# Altium PCB xbee reciever and main.PcbDoc
Units mil, origin at the board's own origin, x right, y up, seen from the top; angles counter-clockwise.
Board outline 2348.03 x 1777.03 mil, 2 copper layers (Top Layer, Bottom Layer); 54 components, 38 nets, 205 pads, 126 vias.
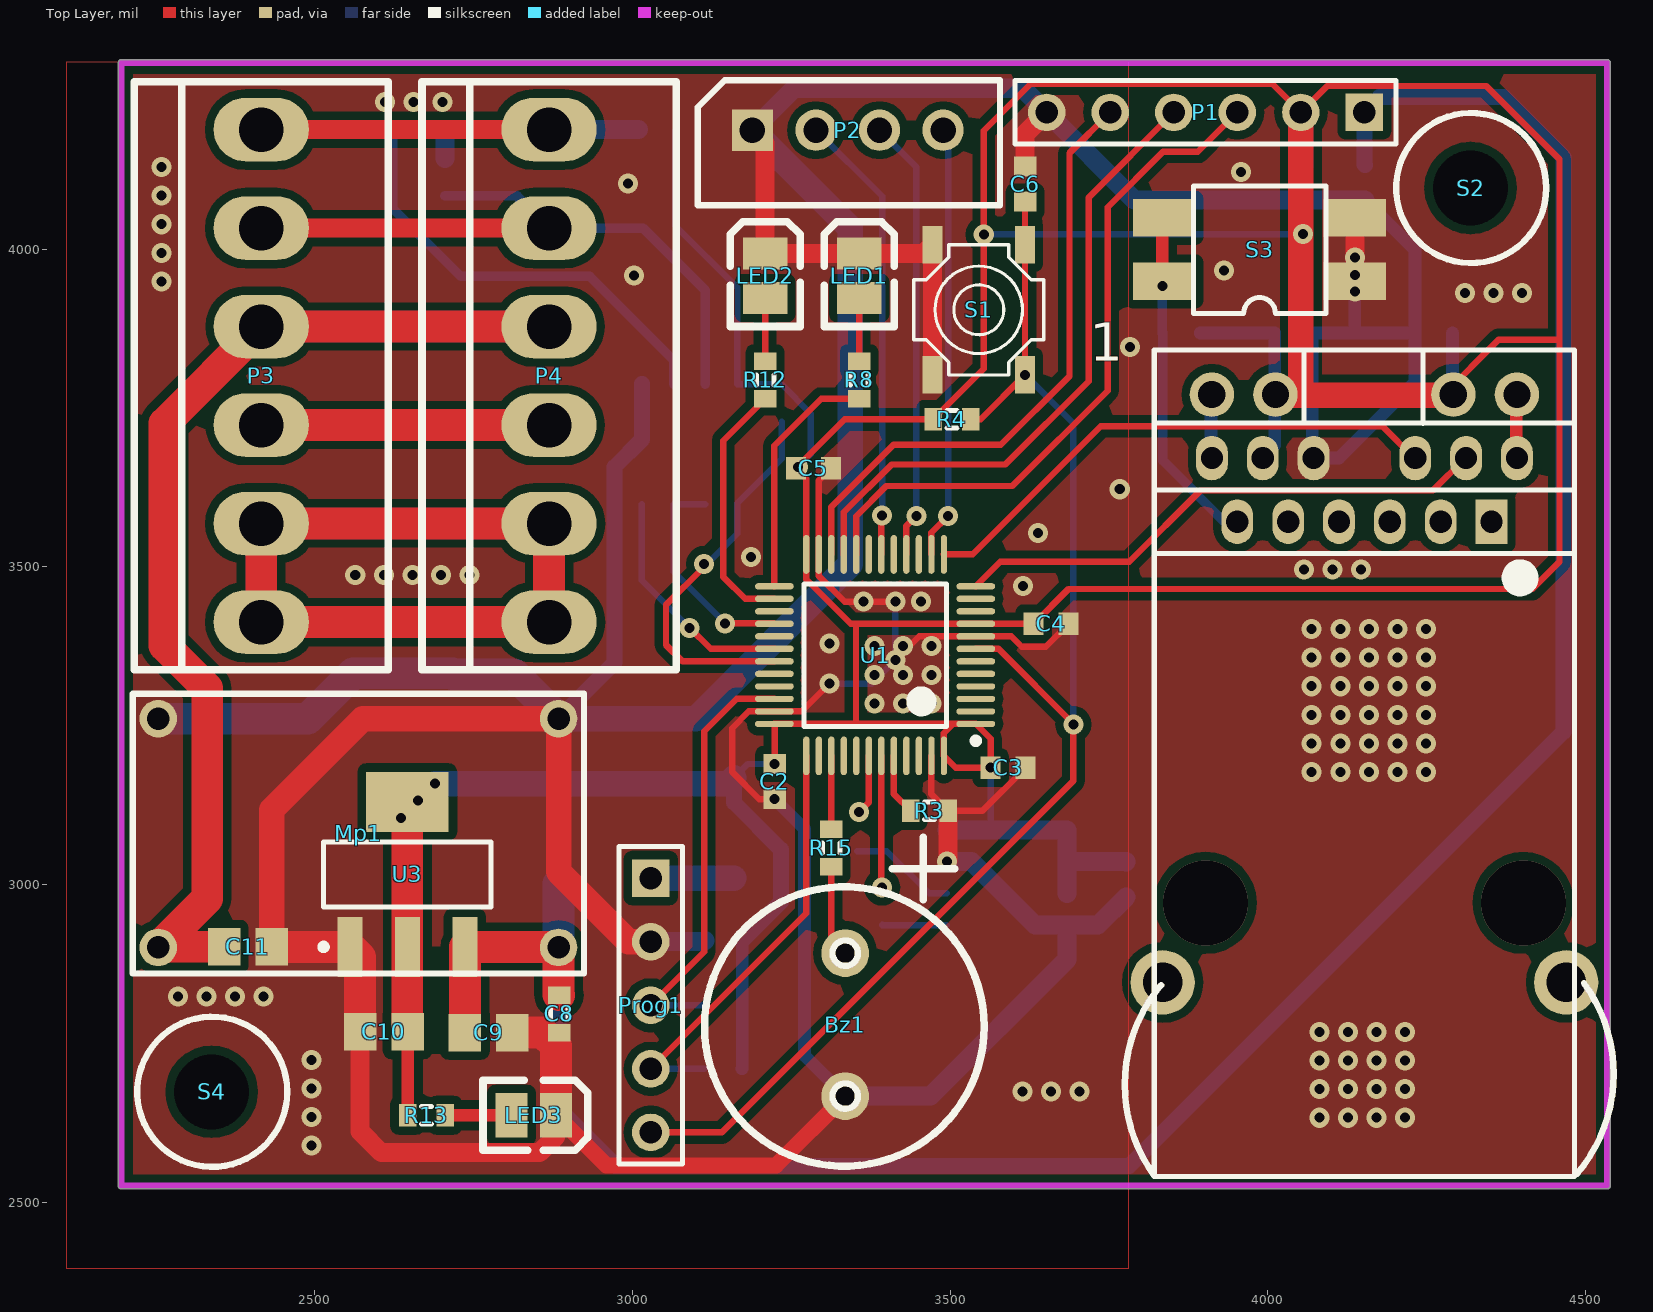
[diagram p0: Top Layer view]
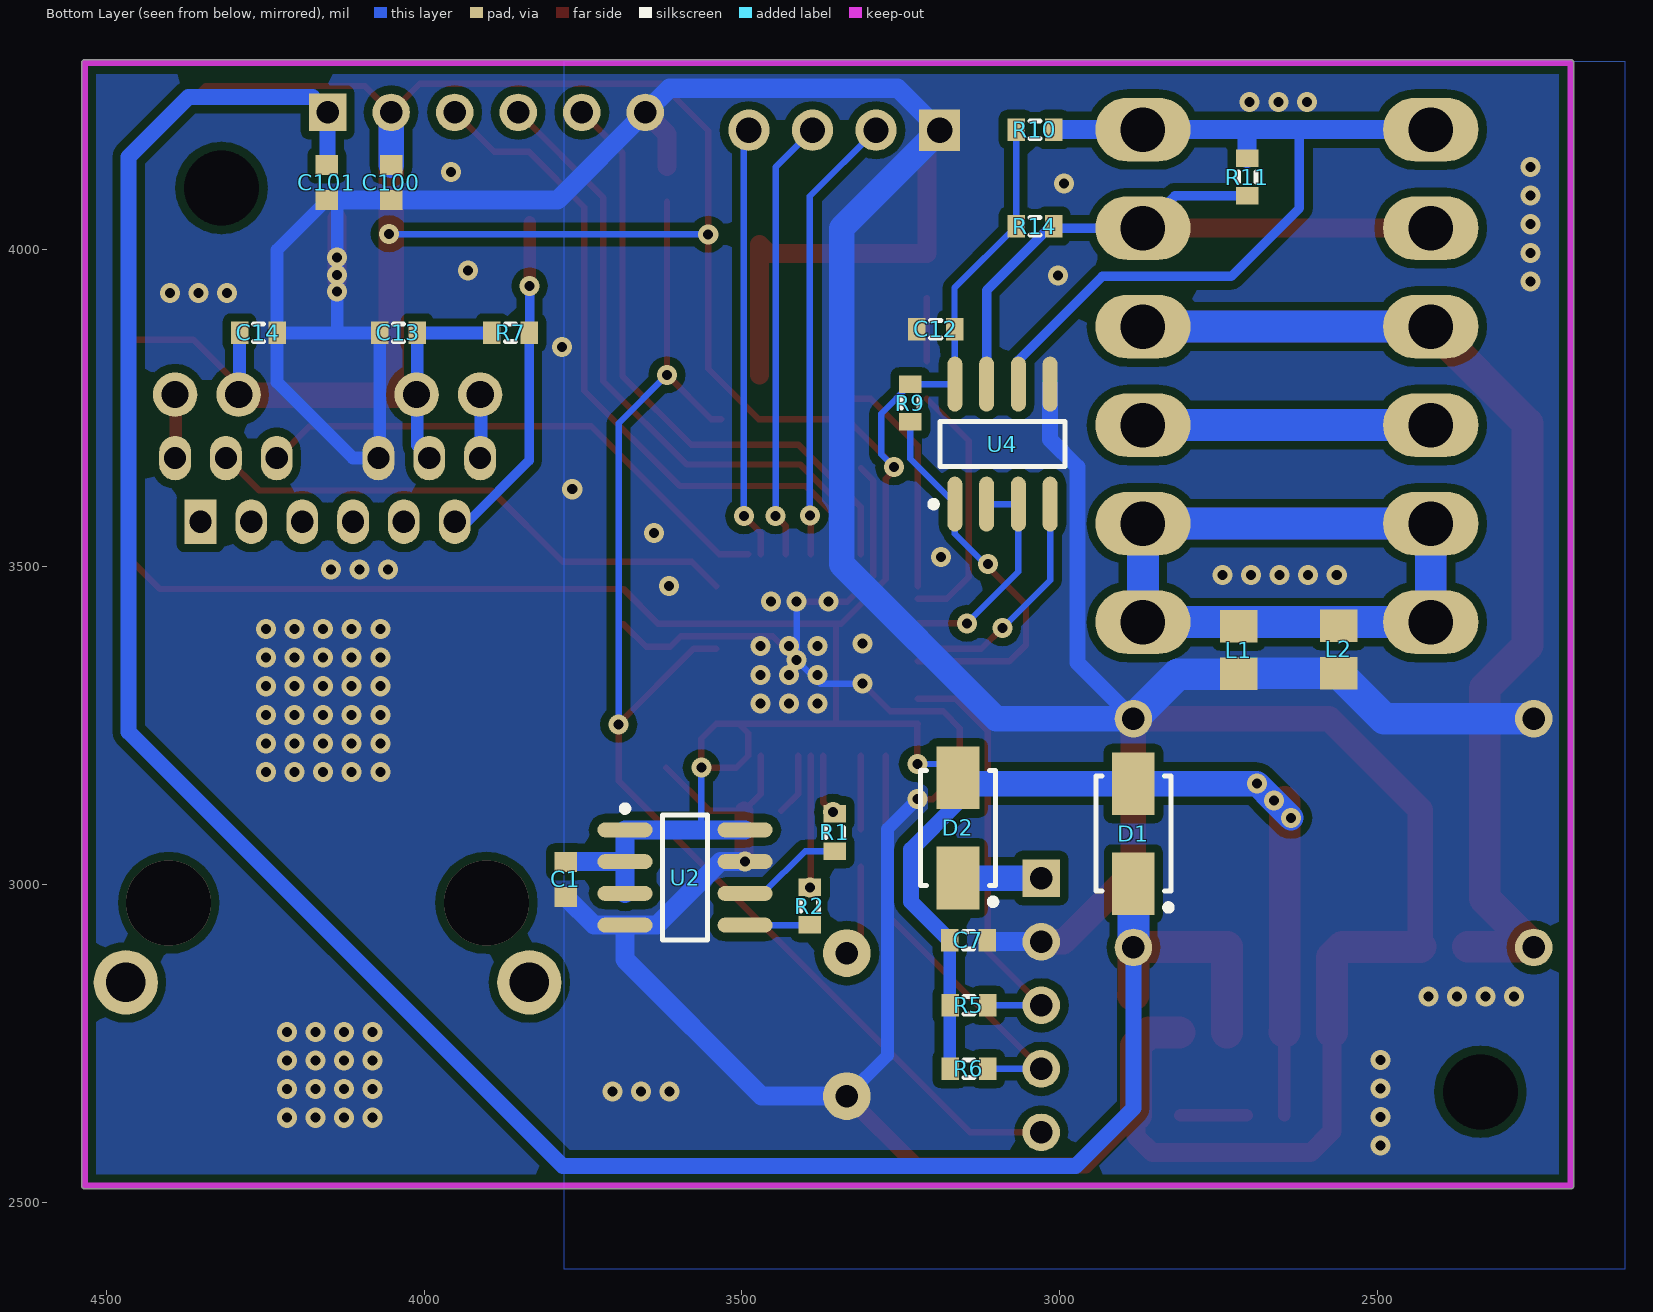
[diagram p1: Bottom Layer view, seen from below]

## Layer stack, top to bottom
Top Solder: solder mask 0.4, Solder Resist, Dk 3.5
Top Layer: signal copper 1.4
Dielectric 1: dielectric 12.6, FR-4, Dk 4.8
Bottom Layer: signal copper 1.4
Bottom Solder: solder mask 0.4, Solder Resist, Dk 3.5

## Board outline
2196,2520.99 cw(c2196,2526) 2190.99,2526 2190.99,4293 cw(c2196,4293) 2196,4298.02 4534,4298.02 cw(c4534,4293) 4539.02,4293 4539.02,2526 cw(c4534,2526) 4534,2520.99

## Design rules (kind name [scope] priority, off if disabled: settings)
AssemblyTestPointUsage [All] p1 off:
AssemblyTestpoint [All] p1 off: testpointundercomponent=TRUE minsize=40 maxsize=100 preferedsize=60 minholesize=0 maxholesize=40 preferedholesize=32 testpointgrid=1 usegrid=TRUE gridtolerance=0.01 allowsidetop=TRUE allowsidebottom=TRUE
Clearance Clearance_1 [All vs InPolygon] p1: gap=13 ignorepadtopadclearanceinfootprint=FALSE except(0: Arc-Hole Track-Hole SMDPad-Hole THPad-Hole Via-Hole Fill-Hole Poly-Hole Region-Hole Text-Hole)
Clearance [All] p2: gap=7 ignorepadtopadclearanceinfootprint=FALSE except(0: Arc-Hole Track-Hole SMDPad-Hole THPad-Hole Via-Hole Fill-Hole Poly-Hole Region-Hole Text-Hole)
ComponentClearance [All] p1 off: gap=10 collisioncheckmode=3 verticalgap=10 showdistances=FALSE
FabricationTestPointUsage [All] p1 off: valid=0 allowmultiple=FALSE
FabricationTestpoint [All] p1 off: side=3 testpointundercomponent=TRUE minsize=40 maxsize=100 preferedsize=60 minholesize=0 maxholesize=40 preferedholesize=32 testpointgrid=1 allowsidetop=TRUE allowsidebottom=TRUE usegrid=TRUE gridtolerance=0.01
Height [All] p1 off: minheight=0 maxheight=1000 prefheight=500
HoleSize [All] p1 off: absolutevalues=TRUE maxlimit=100 minlimit=1 maxpercent=80.000 minpercent=20.000
HoleToHoleClearance [All] p1 off: gap=10 allowstackedmicrovias=TRUE
LayerPairs [All] p1 off: enforce=TRUE
MinimumSolderMaskSliver [All] p1 off: minsoldermaskwidth=10
NetAntennae [All] p1 off: netantennaetolerance=0
PasteMaskExpansion [All] p1 off: expansion=0
PlaneConnect [All] p1: planeconnectstyle=Direct reliefexpansion=20 reliefentries=4 reliefconductorwidth=10 reliefairgap=10
PolygonConnect [All] p1: connectstyle=Direct reliefconductorwidth=10 reliefentries=4 polygonreliefangle="90 Angle" airgapwidth=10
RoutingVias [All] p1: holewidth=15.75 width=31.5 viastyle="Through Hole" minholewidth=11.81 minwidth=23.62 maxholewidth=28 maxwidth=50
SilkToSilkClearance [All] p1 off: silktosilkclearance=10
SilkToSolderMaskClearance [IsPad] p1 off: minsilkscreentomaskgap=10 clearancetoexposedcopper=TRUE
SolderMaskExpansion [All] p1 off: expansion=4
Width [All] p1: maxlimit=100 minlimit=10 preferedwidth=10
15 further rules are at their usual default settings.

## Components (designator, comment, footprint, x,y, rotation, side; value= is the part's Value field where it differs from the comment)
1 "USR-K" USR-K1 4352,3571 r270 top
Bz1 "BUZZER" BUZZER 3335,2779.5 r0 top locked
C1 "" 1608[0603] 3777,3008 r90 bottom value=100nF
C2 "" 1608[0603] 3224,3162 r90 top value=100nF
C3 "" 1608[0603] 3591.44,3184 r180 top value=100nF
C4 "" 1608[0603] 3659,3410 r180 top value=100nF
C5 "" 1608[0603] 3285,3655 r180 top value=100nF
C6 "" 1608[0603] 3618,4102 r270 top value=100nF
C7 "" j1-0603 3143.53,2912 r0 bottom value=100nF
C8 "100nF" J1-0603 2885,2796.47 r90 top
C9 "Cap_El" 2012[0805] 2774,2767 r0 top value=10uF
C10 "Cap_El" 2012[0805] 2609,2768 r180 top value=10uF
C11 "Cap_El" 2012[0805] 2395,2902 r0 top value=10uF
C12 "Cap" j1-0603 3195,3874 r180 bottom value=100nF
C13 "100nF" J1-0603 4040.47,3868 r180 bottom
C14 "100nF" J1-0603 4261,3868 r0 bottom
C100 "" 1608[0603] 4052,4104.44 r90 bottom value=100nF
C101 "" 1608[0603] 4153,4104.44 r90 bottom value=100nF
D1 "1N4007" US1M 2884,3080 r270 bottom
D2 "1N4007" US1M 3160,3089 r270 bottom
L1 "" 2012[0805] 2718,3369 r90 bottom value=100uH
L2 "" 2012[0805] 2561,3370 r90 bottom value=100uH
LED1 "LED1" 3518 3357,3958 r90 top
LED2 "LED2" 3518 3209,3958 r90 top
LED3 "LED2" 3518 2845,2637 r0 top
Mp1 "Mp1584" mp1584-1.8 2214,2861 r0 top locked
P1 "Header 6" HDR1X6 4152,4215 r180 top
P2 "Header 4" "JP circular 4" 3189,4187 r0 top
P3 "BUS connector" CON6-TIWAN 2416,3800.5 r270 top
P4 "BUS connector" con6-tiwan 2869,3800.5 r270 top
Prog1 "Progrommer" HDR1x5 3029,3010 r270 top
R1 "Res1" j1-0603 3354,3082 r90 bottom value=100
R2 "Res1" j1-0603 3393,2966 r90 bottom value=100
R3 "10K" J1-0603 3467.53,3116 r180 top value=1K
R4 "" J1-0603 3503,3732 r0 top value=10k
R5 "" J1-0603 3143,2810 r0 bottom value=10k
R6 "" J1-0603 3143,2710 r0 bottom value=10k
R7 "10K" J1-0603 3864,3868 r0 bottom value=1K
R8 "Res1" j1-0603 3357,3794 r90 top value=220
R9 "Res1" j1-0603 3235,3757.53 r270 bottom value=10K
R10 "Res1" j1-0603 3039,4188 r180 bottom value=4.7K
R11 "Res1" j1-0603 2705,4113 r270 bottom value=120
R12 "Res1" j1-0603 3209,3794 r90 top value=220
R13 "Res1" j1-0603 2676,2637 r0 top value=220
R14 "Res1" j1-0603 3039,4036 r0 bottom value=4.7K
R15 "220" j1-0603 3313,3057.47 r270 top value=1K
S1 "RST-SW" SW-PB-4P 3472.33,3802 r90 top
S2 "Screw Hole" "Screw Holw 3-6 mm" 4320,4096 r0 top
S3 "SW DIP-2" SMD-4 3987,3999 r90 top
S4 "Screw Hole" "Screw Holw 3-6 mm" 2339,2673.79 r0 top
U1 "STM32F100C8T6B" STM-LQFP48_L 3382,3361 r180 top
U2 "AT24C256C" 8S1_N 3589.49,3011 r180 bottom
U3 "REG1117-3.3" SOT223 2646,3016 r90 top
U4 "MAX485CSA" NSO8_N 3090,3693 r90 bottom

## Footprints (in the part's own frame and the unit in brackets; to place one, negate y for a bottom-side part, rotate by r counter-clockwise, add the part's x,y. Pads: shape width x height; smd on the part's side, far side on the other; paste and mask are expansions set on the pad)
8S1_N [mm] "SOIC, 8-Leads, Body 4.9x3.9mm, Pitch 1.27mm, IPC Medium Density"
  oval 2.2x0.6 smd: 1(-2.4,1.905) 2(-2.4,0.635) 3(-2.4,-0.635) 4(-2.4,-1.905) 5(2.4,-1.905) 6(2.4,-0.635) 7(2.4,0.635) 8(2.4,1.905)
  silkscreen extent -2.53,-2.5 0.9,2.88, body extent -2,-2.5 2,2.5, height 1.75
1608[0603] [mm] "Chip Capacitor, Body 1.6x0.8mm, IPC High Density"
  rect 0.8x0.9 smd: 1(-0.7,0) 2(0.7,0)
  body extent -0.87,-0.48 0.87,0.48, height 1.3
2012[0805] [mm] "Chip Resistor; Body 2.0 x 1.3 mm (LxW typ)"
  rect 1.3x1.5 smd: 1(-0.95,0) 2(0.95,0)
  body extent -1.22,-0.75 1.28,0.75, height 0.5
3518 [mil]
  rect 50x70 smd: 1(35,0) 2(-35,0)
  silkscreen extent -80,-55 85,55, body extent -63,-31 63,32, height 43
BUZZER [mil]
  round 75 hole 35.43: 1(0,112.5) 2(0,-112.5)
  silkscreen extent -221,-223 219,295
CON6-TIWAN [mil]
  oval 100x150 hole 70: 1(-387.5,0) 2(-232.5,0) 3(-77.5,0) 4(77.5,0) 5(232.5,0) 6(387.5,0)
  silkscreen extent -463,-200 463,200
con6-tiwan [mil]
  oval 100x150 hole 70: 1(-387.5,0) 2(-232.5,0) 3(-77.5,0) 4(77.5,0) 5(232.5,0) 6(387.5,0)
  silkscreen extent -463,-200 463,200
HDR1x5 [mm] "Connector; Header; 5 Position"
  rect 1.5x1.5 hole 0.9: 1(0,0)
  round 1.5 hole 0.9: 2(2.54,0) 3(5.08,0) 4(7.62,0) 5(10.16,0)
  silkscreen extent -1.27,-1.27 11.43,1.27
HDR1X6 [mm] "Connector; Header; 6 Position"
  rect 1.5x1.5 hole 0.9: 1(0,0)
  round 1.5 hole 0.9: 2(2.54,0) 3(5.08,0) 4(7.62,0) 5(10.16,0) 6(12.7,0)
  silkscreen extent -1.27,-1.27 13.97,1.27
j1-0603 [mm] "Chip Resistor, Body 1.6x0.8mm, IPC High Density"
  rect 0.7x0.9 smd: 1(-0.75,0) 2(0.75,0)
  silkscreen extent -0.2,-0.35 0.2,0.35, body extent -0.85,-0.48 0.85,0.48, height 0.9
J1-0603 [mm] "Chip Resistor, Body 1.6x0.8mm, IPC High Density"
  rect 0.7x0.9 smd: 1(-0.75,0) 2(0.75,0)
  silkscreen extent -0.2,-0.35 0.2,0.35, body extent -0.85,-0.48 0.85,0.48, height 0.9
"JP circular 4" [mil]
  rect 65x65 hole 40: 1(0,0)
  round 65 hole 40: 2(100,0) 3(200,0) 4(300,0)
  silkscreen extent -86,-118 390,79, body extent -92,-118 396,74, height 216
mp1584-1.8 [mm]
  round 1.5 hole 0.9: 1(1.016,10.16) 2(1.016,1.016) 3(17.016,10.16) 4(17.016,1.016)
  silkscreen extent 0,-0.03 18.03,11.15
NSO8_N [mm] "SOIC, 8-Leads, Body 4.9x3.9mm, Pitch 1.27mm, IPC Medium Density"
  oval 2.2x0.6 smd: 1(-2.4,1.905) 2(-2.4,0.635) 3(-2.4,-0.635) 4(-2.4,-1.905) 5(2.4,-1.905) 6(2.4,-0.635) 7(2.4,0.635) 8(2.4,1.905)
  silkscreen extent -2.52,-2.5 0.9,2.88, body extent -2,-2.5 2,2.5, height 1.75
"Screw Holw 3-6 mm" [mil]
  round 0 hole 118.11: 0(-1,0)
  silkscreen extent -118,-118 118,118
SMD-4 [mm] "DIP; 4 Leads; Row Spacing 7.62 mm; Pitch 2.54 mm"
  rect 1.5x2.5 smd: 1(-1.27,-3.81) 2(1.27,-3.81) 3(1.27,3.81) 4(-1.27,3.81)
  silkscreen extent -2.55,-2.65 2.55,2.65
SOT223 [mm] "SOT223, 4-Leads, Body 6.7x7.3mm (max), Pitch 2.30mm, IPC Medium Density"
  rect 2.4x1 smd: 1(-2.9,2.3) 2(-2.9,0) 3(-2.9,-2.3)
  rect 2.4x3.3 smd: 4(2.9,0)
  silkscreen extent -3.02,-3.35 1.3,3.47, body extent -1.85,-3.35 1.85,3.35, height 1.8
STM-LQFP48_L [mm] "QFP, 48-Leads, Body 7x7mm, Pitch 0.5mm, IPC High Density"
  oval 1.55x0.25 smd: 1(-4.025,2.75) 2(-4.025,2.25) 3(-4.025,1.75) 4(-4.025,1.25) 5(-4.025,0.75) 6(-4.025,0.25) 7(-4.025,-0.25) 8(-4.025,-0.75) 9(-4.025,-1.25) 10(-4.025,-1.75) 11(-4.025,-2.25) 12(-4.025,-2.75) 25(4.025,-2.75) 26(4.025,-2.25) 27(4.025,-1.75) 28(4.025,-1.25) 29(4.025,-0.75) 30(4.025,-0.25) 31(4.025,0.25) 32(4.025,0.75) 33(4.025,1.25) 34(4.025,1.75) 35(4.025,2.25) 36(4.025,2.75)
  oval 0.25x1.55 smd: 13(-2.75,-4.025) 14(-2.25,-4.025) 15(-1.75,-4.025) 16(-1.25,-4.025) 17(-0.75,-4.025) 18(-0.25,-4.025) 19(0.25,-4.025) 20(0.75,-4.025) 21(1.25,-4.025) 22(1.75,-4.025) 23(2.25,-4.025) 24(2.75,-4.025) 37(2.75,4.025) 38(2.25,4.025) 39(1.75,4.025) 40(1.25,4.025) 41(0.75,4.025) 42(0.25,4.025) 43(-0.25,4.025) 44(-0.75,4.025) 45(-1.25,4.025) 46(-1.75,4.025) 47(-2.25,4.025) 48(-2.75,4.025)
  silkscreen extent -4.15,-2.85 2.85,3.55, body extent -3.5,-3.5 3.5,3.5, height 1.6
SW-PB-4P [mm]
  rect 1.5x0.8 smd: 1(0,0) 1(5.2,0) 2(0,-3.7) 2(5.2,-3.7)
  silkscreen extent 0,-4.45 5.2,0.75, body extent 0,-4.45 5.22,0.75, height 2.2
US1M [mm] "Molded Diode, 2-Leads, Body 4.3x2.6mm, IPC Medium Density"
  rect 2.5x1.7 smd: 1(-2,0) 2(2,0)
  silkscreen extent -2.3,-1.5 3.07,1.52, body extent -2.3,-1.46 2.3,1.46, height 2.3
USR-K1 [mil]
  rect 70x50 hole 35: 1(0,0)
  oval 70x50 hole 35: 2(0,-80) 3(0,-160) 4(0,-240) 5(0,-320) 6(0,-400) 7(-100,40) 8(-100,-40) 9(-100,-120) 10(-100,-280) 11(-100,-360) 12(-100,-440)
  round 70 hole 43: 13(-200,40) 14(-200,-60) 15(-200,-340) 16(-200,-440)
  round 101.18 hole 61.81: 17(725,117.5) 17(725,-517.5)
  silkscreen extent -270,-577 1030,192, body extent -323,-549 1023,150, height 542

## Part data
C1 C2 C3 C4 C5 C6 C7 C100 C101: library part Cap, "Capacitor", Manufacturer="Generic Components", Class=Passive, Published=08/06/2000, Publisher="Altium Hobart Technology Centre", SubClass=Capacitor
C8 C13 C14: library part Cap, "Capacitor", LatestRevisionDate=17-Jul-2002, LatestRevisionNote="Re-released for DXP Platform.", PackageReference=RAD-0.3, Published=8-Jun-2000, Publisher="Altium Limited"
C9 C10 C11 C12: "Capacitor", Publisher="Altium Limited"
  C9 C10 C11: PackageReference=CAPR5-4X5, Published=23-Sep-2002
  C12: LatestRevisionDate=17-Jul-2002, LatestRevisionNote="Re-released for DXP Platform.", PackageReference=RAD-0.3, Published=8-Jun-2000
D1 D2: library part Diode, "1 Amp General Purpose Rectifier", Package Information="Latest Revision: Aug-1999", Package Reference=DO-41, Code - JEDEC=DO-204-AL, Datasheet="Latest Revision: 1998", Published=8-Jun-2000, Publisher="Altium Limited", Revision 1="11-Jul-2000: SIM Model Added.", Revision 2="17-Jul-2002: Re-released for DXP Platform."
L1 L2: library part Inductor, "Inductor", Manufacturer="Generic Components", Class=Passive, Published=08/06/2000, Publisher="Altium Hobart Technology Centre", SubClass=Inductor
LED1 LED2 LED3: library part LED3, "Typical BLUE SiC LED", PackageDocument=16-Apr-2002, DatasheetDocument=16-Apr-2002, LatestRevisionDate=17-Dec-2003, LatestRevisionNote="PCB Footprint replaced.", PackageReference=3.5X2.8X1.9, Published=8-Jun-2000, Publisher="Altium Limited"
P1: "Header, 6-Pin", LatestRevisionDate=17-Jul-2002, LatestRevisionNote="Re-released for DXP Platform.", Publisher="Altium Limited"
P2: "Header, 4-Pin", LatestRevisionDate=17-Jul-2002, LatestRevisionNote="Re-released for DXP Platform.", Publisher="Altium Limited"
P3 P4: library part "Header 6", "Header, 6-Pin", LatestRevisionDate=17-Jul-2002, LatestRevisionNote="Re-released for DXP Platform.", Publisher="Altium Limited"
Prog1: library part "Header 5", "Header, 5-Pin", LatestRevisionDate=17-Jul-2002, LatestRevisionNote="Re-released for DXP Platform.", Publisher="Altium Limited"
R1 R2 R8 R9 R10 R11 R12 R13 R14: "Resistor", LatestRevisionDate=17-Jul-2002, LatestRevisionNote="Re-released for DXP Platform.", PackageReference=AXIAL-0.3, Published=8-Jun-2000, Publisher="Altium Limited"
R3 R7 R15: library part Res1, "Resistor", LatestRevisionDate=17-Jul-2002, LatestRevisionNote="Re-released for DXP Platform.", PackageReference=AXIAL-0.3, Published=8-Jun-2000, Publisher="Altium Limited"
R4 R5 R6: library part Res, "Semiconductor Resistor", LatestRevisionDate=17-Jul-2002, LatestRevisionNote="Re-released for DXP Platform.", PackageReference=AXIAL-0.5, Published=8-Jun-2000, Publisher="Altium Limited"
S1: library part SW-PB, "Switch", LatestRevisionDate=17-Jul-2002, LatestRevisionNote="Re-released for DXP Platform.", PackageReference=SPST-2, Published=24-Mar-1999, Publisher="Altium Limited"
U1: "ARM Cortex-M3 32-bit MCU, 64 KB Flash, 8 KB Internal RAM, 37 I/Os, 48-pin LQFP, -40 to 85 degC, Tray", I/Os (High Current)=37, Operating Frequency(F) (Processor speed) (MHz)=24, Supplier Part Number 1=497-10499-ND, Supply Voltage(Vcc) min (V)=2, A/D Converter="1x12-bit (10 Channel)", ComponentLink1Description="Manufacturer URL", ComponentLink1URL=http://www.st.com/web/en/home.html, ComponentLink2Description=Datasheet, ComponentLink2URL=http://www.st.com/st-web-ui/static/active/en/resource/technical/document/datasheet/CD00251732.pdf, ComponentLink3Description="Package Specification", ComponentLink3URL=http://www.st.com/st-web-ui/static/active/en/resource/technical/document/datasheet/DM00058181.pdf, Core="ARM Cortex-M3", D/A Converter="2x12-bit (2 Channel)", DatasheetVersion="Rev. 7", FLASH Size (Prog) (kB)=64, Internal RAM Size (kB)=8, Mounting Technology="Surface Mount", PackageDescription="48-Pin Low Profile Quad Flat Package, 7 x 7 mm Body, 0.5 mm Pitch", PackageReference=LQFP48, PackageVersion="Rev. 6, 06/2013", Packing=Tray, PartNumber=STM32F100C8T6B, Supplier 1=Digi-Key, Supplier 2=Farnell, Supplier 3=Newark, Supplier 4=Mouser, Supplier Part Number 2=1838511, Supplier Part Number 3=76R0988, Supplier Part Number 4=511-STM32F100C8T6B
U2: library part AT24C04BN-SP25-B, "4Kbit (512 x 8), 2-wire Bus Automotive Serial EEPROM with Write Protect, 2.5V, 8-Pin SOIC, Bulk", Code_IPC=SOIC127P600-8, Code_JEDEC=MS-012-AA, ComponentLink1Description="Manufacturer Link", ComponentLink1URL=http://www.atmel.com/products/serial/default.asp, ComponentLink2Description=Datasheet, ComponentLink2URL=http://www.atmel.com/dyn/resources/prod_documents/doc8517.pdf, ComponentLink3Description="Atmel.com Home", ComponentLink3URL=http://www.atmel.com, DatasheetVersion="8517C,  Jan-2009", PackageDescription="8-Lead (0.150\" Wide Body), Plastic Gull Wing Small Outline (JEDEC SOIC)", PackageReference=8S1, PackageVersion="revC, Mar-2005", Published=20-Sep-2010, Publisher="Altium Limited"
U3: "800mA and 1A Low Dropout Positive Regulator 2.85V, 3.3V, 5V, and Adjustable", ComponentLink1Description="Manufacturer Link", ComponentLink1URL=http://www.ti.com/, ComponentLink2Description=Datasheet, ComponentLink2URL=http://www-s.ti.com/sc/ds/REG1117.pdf, DatasheetVersion=Sep-1997, LatestRevisionDate=17-Jul-2002, LatestRevisionNote="Re-released for DXP Platform.", PackageDescription="SOT-223/SC-73; 4 Leads; Body 6.7 x 7.3 mm, inc. leads (LxW max)", PackageReference=ZZ311, PackageVersion=revC, Published=8-Jun-2000, Publisher="Altium Limited"
U4: "Low-Power, Slew-Rate-Limited RS-485/RS-422 Transceiver", Code_IPC=SOIC127P600-8, Code_JEDEC=MS-012-AA, ComponentLink1Description="Manufacturer Link", ComponentLink1URL=http://www.maxim-ic.com/, ComponentLink2Description=Datasheet, ComponentLink2URL=http://pdfserv.maxim-ic.com/en/ds/MAX1487-MAX491.pdf, DatasheetVersion=Feb-1996, LatestRevisionDate=13-Apr-2006, LatestRevisionNote="IPC-7351 Footprint Added.", PackageDescription="8-Pin Small Outline Integrated Circuit 1.27 mm Pitch", PackageReference=NSO8, Published=16-Jan-2001, Publisher="Altium Limited"

## Via types
v1: diameter 31.5, hole 15.75, Top Layer to Bottom Layer, tented both sides, 124 vias
v2: diameter 133.86, hole 133.86, Top Layer to Bottom Layer, 2 vias

## Nets (pads, with @x,y where several pads share a name; then routed paths per layer and width w, separated by ;. In a path a pad name is that pad's centre, name@x,y a point inside that pad or via, vN(x,y) a via of type N, cw(c..) or ccw(c..) an arc to the next point about the centre after c; other vN are vias at no path point)
+3.3: 1.11 1.14 1.15 C1.2 C2.2 C3.2 C4.2 C5.2 C7.2 C10.1 C12.2 C13.2 C14.2 C100.2 D1.1 D2.1 P1.2 R4.1 R5.2 R6.2 R7.2 R9.1 R10.1 R13.1 R14.2 U1.1 U1.9 U1.24 U1.36 U1.48 U2.1 U2.2 U2.3 U2.8 U3.2 U3.4 U4.8 | length 9268.7
  Top Layer w10: v1(3224,3189.56) 3224,3252.27 U1.36 3352,3252.73 ; 1.14@4276,3770 4363,3857 4459,3857 ; 3352,3252.73 3504.73,3252.73 ; 3352,3252.73 3352,3410.21 ; 3352,3410.21 3343.79,3410.21 3273.73,3480.27 U1.24 3273.73,3638.71 C5.2 3334.44,3732 R4.1 3553,3811.53 v1(3553,4023) 3553,4186 3627,4260 4007,4260 P1.2 4093.53,4256.53 4343.47,4256.53 4459,4141 4459,3857 ; 3352,3410.21 U1.9 3631.23,3410.21 C4.2 3686.44,3465 4416,3465 4459,3508 4459,3857 ; 3504.73,3252.73 U1.1 3563.88,3229.32 v1(3563.88,3184) 3508.8,3184 U1.48 3490.27,3238.27 3504.73,3252.73
  Top Layer w20: C10.1 2646.4,2637.07 R13.1
  Top Layer w40: 1.15@4011,3785 4026,3770 1.14@4276,3770 ; 4052,3787 P1.2
  Top Layer w50: U3.4 U3.2 2646,2768.4 C10.1
  Bottom Layer w10: R10.1 R14.2 3165.47,3939.06 C12.2 3165,3873.53 U4.8 3165.43,3787.06 R9.1 3281,3741.06 3281,3677 v1(3261,3657) ; D2.1 3181.82,3189.56 v1(3224,3189.56) ; v1(3553,4023) 4054,4023 v1(4055,4024) ; v1(3563.88,3184) 3563.88,3090.12 3568,3086
  Bottom Layer w20: R6.2 3173.06,2710.53 C7.2 ; R7.2 C13.2 4010.94,3785.06 4011,3785 4011,3691.5 1.11@3990.5,3671 ; C14.2 4290.53,3785.47 1.14@4291,3785
  Bottom Layer w25: D2.1 3160,3129 3234,3055 3234,2972.94 C7.2
  Bottom Layer w30: U2.8 3568,3086 U2.1 U2.2 ; U2.3 U2.2 ; C1.2 3776.56,3036 U2.2
  Bottom Layer w40: v1(2636,3105) v1(2662.87,3131.87) v1(2689.74,3158.74) D1.1 3151,3158.74 D2.1 ; C100.2 P1.2
+5: C8.2 C9.1 C101.2 D1.2 Mp1.4 P1.1 U3.3 | length 3963.2
  Top Layer w50: C9.1 U3.3 U3.3 2883.09,2901.83 Mp1.4 2883.92,2827.08 C8.2
  Bottom Layer w25: Mp1.4 2883.92,2648.08 2975,2557 3782,2557 4465,3240 4465,4145 4371,4239 4176,4239 P1.1 4152,4133 C101.2
  Bottom Layer w50: Mp1.4 2883.92,3001.18 D1.2
+12: C11.1 Mp1.2 P3.3 P4.3 | length 2108.2
  Top Layer w50: Mp1.2 Mp1.2@2255,2902 ; C11.1 Mp1.2@2255,2902 ; P4.3 P3.3 2264,3726 2264,3376 2331,3309 2331,2978 Mp1.2@2255,2902
  Bottom Layer w50: P3.3 P4.3
+16: P3.4 P4.4 | length 906
  Top Layer w50: P3.4 P4.4
  Bottom Layer w50: P3.4 P4.4
A_RESET: C6.2 Prog1.5 R4.2 S1.2 U1.7 | length 2154.8
  Top Layer w10: Prog1.5 3141,2610 3694,3163 v1(3694,3252) 3694,3253 3576.16,3370.84 U1.7 ; R4.2 3548,3732 v1(3618,3802) C6.2
  Bottom Layer w10: v1(3618,3802) 3694,3726 v1(3694,3252)
Boot0: R3.2 U1.44 | length 97.5
  Top Layer w10: U1.44 3411.53,3142.47 R3.2
BUZZER: R15.1 U1.39 | length 115.6
  Top Layer w10: R15.1 3313.1,3087.1 U1.39
D+: P3.1 P4.1 R10.2 R11.1 U4.6 | length 1794.5
  Top Layer w30: P3.1 P4.1
  Bottom Layer w15: 2623,4188 2623,4064 2730,3957 2933,3957 3065,3825 U4.6
  Bottom Layer w30: P3.1 2623,4188 2705,4188 ; R11.1 2705,4188 ; R10.2 P4.1 2705,4188
D-: P3.2 P4.2 R11.2 R14.1 U4.7 | length 1072
  Top Layer w30: P3.2 P4.2
  Bottom Layer w15: R11.2 2818.53,4083.47 P4.2 3017,4033 3115,3935 U4.7
EN_MAX: U1.28 U4.2 U4.3 | length 348.9
  Top Layer w10: v1(3146,3411) 3222.75,3411 U1.28
  Bottom Layer w10: U4.2 U4.3 3065,3492 v1(3146,3411)
GND: 1.10 Bz1.2 C1.1 C2.1 C3.1 C4.1 C5.1 C6.1 C7.1 C8.1 C9.2 C10.2 C11.2 C12.1 C13.1 C14.1 C100.1 C101.1 L1.1 L2.1 LED1.1 LED2.1 LED3.1 Mp1.1 Mp1.3 P1.6 P2.1 Prog1.2 R3.1 S1.1 S3.1 S3.2 U1.8 U1.23 U1.35 U1.47 U2.4 U2.7 U3.1 U4.5 | length 11212.3
  Top Layer w10: v1(3224,3134.44) 3199.56,3134.44 3157,3177 3157,3246 3183.42,3272.42 U1.35 3266.42,3272.42 v1(3310,3316) ; C5.1 3293.42,3635.86 U1.23 3293.42,3485.58 3334,3445 v1(3364,3445) v1(3414,3445) ; v1(3414,3353) 3451.53,3390.53 U1.8 3596.47,3390.53 3613,3374 3650.56,3374 C4.1 ; U1.47 3470.58,3142.47 R3.1 3551,3116 C3.1
  Top Layer w25: LED3.1 2959,2558 3226,2558 Bz1.2
  Top Layer w30: C10.2 2571.6,2611.4 2605,2578 2854,2578 2880,2604 LED3.1 ; P2.1 3209,4167 LED2.1 LED1.1 3458.61,3993 3472.33,4006.72 S1.1@3472.33,3802 ; v1(3495,3036) 3497.06,3038.06 R3.1 ; C6.1 3618,4181 P1.6 ; S3.1 v1(4137,3959) v1(4137,3987) S3.2
  Top Layer w40: C11.2 2432.4,3117.4 2576,3261 Mp1.3 2883.92,3020.08 2994,2910 Prog1.2
  Top Layer w50: C11.2 2432.57,2901.83 U3.1 2571.6,2885.68 C10.2 ; C9.2 2859,2767 2880,2746 LED3.1
  Bottom Layer w10: v1(3310,3316) 3377,3316 v1(3414,3353) v1(3414,3445)
  Bottom Layer w20: v1(3224,3134.44) 3271,3087.44 3271,2731 Bz1.2 ; 1.10@4071,3685 1.10@4070,3686 ; C101.1@4136,4076.88 4137,4075.88 v1(4137,3987) v1(4137,3959) v1(4137,3933) 4137,3868 ; C101.1 4231.47,3998.41 C14.1 ; 1.10@4070,3686 4070,3671 1.10 4112,3671 4231.47,3790.47 C14.1 ; 1.10@4070,3686 C13.1 4137,3868 ; 4137,3868 C14.1
  Bottom Layer w25: Mp1.3 2972,3349.08 2972,3657 3015,3700 U4.5
  Bottom Layer w30: Prog1.2 3112,2910 C7.1 ; P2.1 3255,4253 3614,4253 P1.6 3790.12,4076.88 C100.1 4136,4076.88 C101.1 ; Bz1.2 3469,2667 3683.98,2881.98 U2.4 ; v1(3495,3036) 3534,3036 3634,2936 U2.4 ; C1.1 3732.56,2936 U2.4
  Bottom Layer w40: Mp1.3 3100,3261 3343,3504 3343,4033 P2.1
  Bottom Layer w50: Mp1.1 2489.4,3261 L2.1 2717,3332.6 L1.1 2718,3331 2813.92,3331 Mp1.3
  other v1: 2495,2589 4081,2633 4126,2633 4171,2633 4216,2633 2495,2634 3614,2674 3659,2674 3704,2674 4081,2678 4126,2678 4171,2678 4216,2678 2495,2679 4081,2723 4126,2723 4171,2723 4216,2723 2495,2724 4081,2768 4126,2768 4171,2768 4216,2768 2285,2824 2330,2824 2375,2824 2420,2824 4069,3177 4114,3177 4159,3177 4204,3177 4249,3177 4069,3222 4114,3222 4159,3222 4204,3222 4249,3222 4069,3267 4114,3267 4159,3267 4204,3267 4249,3267 3381,3285 3426,3285 3471,3285 4069,3312 4114,3312 4159,3312 4204,3312 4249,3312 3381,3330 3426,3330 3471,3330 4069,3357 4114,3357 4159,3357 4204,3357 4249,3357 3381,3375 3426,3375 3471,3375 3310,3379 4069,3402 4114,3402 4159,3402 4204,3402 4249,3402 3454,3445 3615,3470 2564,3487 2609,3487 2654,3487 2699,3487 2744,3487 4057,3496 4102,3496 4147,3496 3187,3515 3638,3553 3767,3622 3783,3846 4310,3931 4355,3931 4400,3931 2259,3949 3003,3958 3931,3966 2259,3994 2259,4039 2259,4084 2993,4103 3958,4121 2259,4129 2611,4231 2656,4231 2701,4231
IO1: P2.4 U1.14 | length 681.8
  Top Layer w10: U1.14 3470.58,3553.58 v1(3497,3580)
  Bottom Layer w10: P2.4 3497,4179 v1(3497,3580)
IO2: P2.3 U1.16 | length 698.1
  Top Layer w10: U1.16 3431.21,3564.21 v1(3447,3580)
  Bottom Layer w10: P2.3 3447,4129 v1(3447,3580)
IO3: P2.2 U1.18 | length 711.1
  Top Layer w10: U1.18 3391.84,3579.84 v1(3393,3581)
  Bottom Layer w10: P2.2 3393,4083 v1(3393,3581)
LED1: R8.1 U1.25 | length 385.4
  Top Layer w10: U1.25 3223.54,3690.54 3297.47,3764.47 R8.1
LED2: R12.1 U1.26 | length 402.6
  Top Layer w10: R12.1 3143,3698.47 3143,3484 3177.42,3449.58 U1.26
Net1_6: 1.6 R7.1 S3.3 S3.4 | length 533.7
  Top Layer w20: v1(3834,3942) S3.3@3834,4042
  Bottom Layer w15: R7.1@3834,3866.47 v1(3834,3942) ; R7.1@3835,3869 3835,3667 3932,3570 1.6@3951,3570
Net1_7: 1.7 1.13 | length 100
  Top Layer w20: 1.7@4391,3685 1.13@4391,3785
Net1_12: 1.12 1.16 | length 100
  Bottom Layer w20: 1.12@3910.5,3673 1.16@3910.5,3773
NetBz1_1: Bz1.1 R15.2 | length 145.1
  Top Layer w10: R15.2 3313,2914 Bz1.1
NetD2_2: D2.2 Prog1.1 | length 131.1
  Bottom Layer w40: Prog1.1 3159.74,3010 D2.2
NetLED1_1: LED1.2 R8.2 | length 99.5
  Top Layer w10: R8.2 LED1.2
NetLED2_1: LED2.2 R12.2 | length 99.5
  Top Layer w10: R12.2 LED2.2
NetLED3_1: LED3.2 R13.2 | length 104.5
  Top Layer w20: R13.2 LED3.2
NetR1_1: R1.1 U2.6 | length 168.5
  Bottom Layer w10: R1.1 3400.53,3052.47 3467,2986 U2.6
NetR2_1: R2.1 U2.5 | length 102.2
  Bottom Layer w10: R2.1 3393.47,2936 U2.5
PGND: L1.2 L2.2 P3.5 P3.6 P4.5 P4.6 | length 2432
  Top Layer w50: P3.6 P3.5 P4.5 P4.6 P3.6
  Bottom Layer w50: P3.6 P3.5 P4.5 P4.6 P3.6
RESET: P1.3 U1.20 | length 1092.2
  Top Layer w10: U1.20 3352.47,3579.71 3399.76,3627 3598,3627 3748,3777 3748,4066 3835,4153 3890,4153 P1.3
RXD_BUS: R9.2 U1.31 U4.1 | length 610
  Top Layer w10: v1(3113,3504) 3113,3500 3053,3440 3053,3377 3078.84,3351.16 U1.31
  Bottom Layer w10: v1(3113,3504) 3117,3504 3165,3552 U4.1 3165,3600.24 3235,3670.24 R9.2
RXD_USRK1: 1.9 U1.13 | length 844.4
  Top Layer w10: U1.13 3535.46,3519.46 3737,3721 4180.5,3721 1.9@4230.5,3671
SCL: R1.2 U1.42 | length 94.8
  Top Layer w10: v1(3357,3114) 3372.16,3129.16 U1.42
SDA: R2.2 U1.43 | length 207.5
  Top Layer w10: U1.43 3391.84,2996.69 v1(3393,2995.53)
SWCLK: Prog1.4 R6.1 U1.37 | length 678.4
  Top Layer w10: Prog1.4 3273.73,2954.73 U1.37
  Bottom Layer w10: Prog1.4 R6.1
SWDIO: Prog1.3 R5.1 U1.34 | length 682
  Top Layer w10: Prog1.3 3113,2894 3113,3241 3164.1,3292.1 U1.34
  Bottom Layer w10: Prog1.3 R5.1
TXD_BUS: U1.30 U4.4 | length 371.4
  Top Layer w10: v1(3090,3404) 3123.16,3370.84 U1.30
  Bottom Layer w10: U4.4 3015,3479 v1@3089,3405
TXD_USRK1: 1.8 U1.12 | length 853.6
  Top Layer w10: U1.12 3579.2,3508 3782,3508 3894,3620 4259.5,3620 1.8@4310.5,3671
XBEE_RX: P1.5 U1.22 | length 976.3
  Top Layer w10: U1.22 3313.1,3594.1 3411,3692 3580,3692 3688,3800 3688,4151 P1.5
XBEE_TX: P1.4 U1.21 | length 1015.5
  Top Layer w10: U1.21 3332.79,3585.79 3408,3661 3587,3661 3718,3792 3718,4081 P1.4
pads on no net: 1.1 1.2 1.3 1.4 1.5 1.17 S2.0 S4.0 U1.2 U1.3 U1.4 U1.5 U1.6 U1.10 U1.11 U1.15 U1.17 U1.19 U1.27 U1.29 U1.32 U1.33 U1.38 U1.40 U1.41 U1.45 U1.46
copper on no net:
  other v2: 3902,2971 4402,2971

## Polygon pours and split planes (outlines as drawn)
GND on Bottom Layer "Bottom Layer-No Net" (solid, remove dead copper, pour order 6): 4534,2526 4534,4283 2196,4283 2196,2526
GND on Bottom Layer "Top Layer-No Net" (solid, remove dead copper, shelved, pour order 0): 2110,4295 3780,4295 3780,2395 2110,2395
GND on Top Layer "Bottom Layer-No Net" (solid, remove dead copper, pour order 4): 2196,2526 4534,2526 4534,4283 2196,4283
GND on Top Layer "Top Layer-No Net" (solid, remove dead copper, shelved, pour order 2): 2110,4295 3780,4295 3780,2395 2110,2395

## Keep-outs
Keep-Out Layer:
  lines w10: 2196,2526 2196,4293 4534,4293 4534,2526 2196,2526